# EAGLE board ccnor_stm32_v25-sync-unified-mini_panels (EAGLE 6.1), part 1 of 2
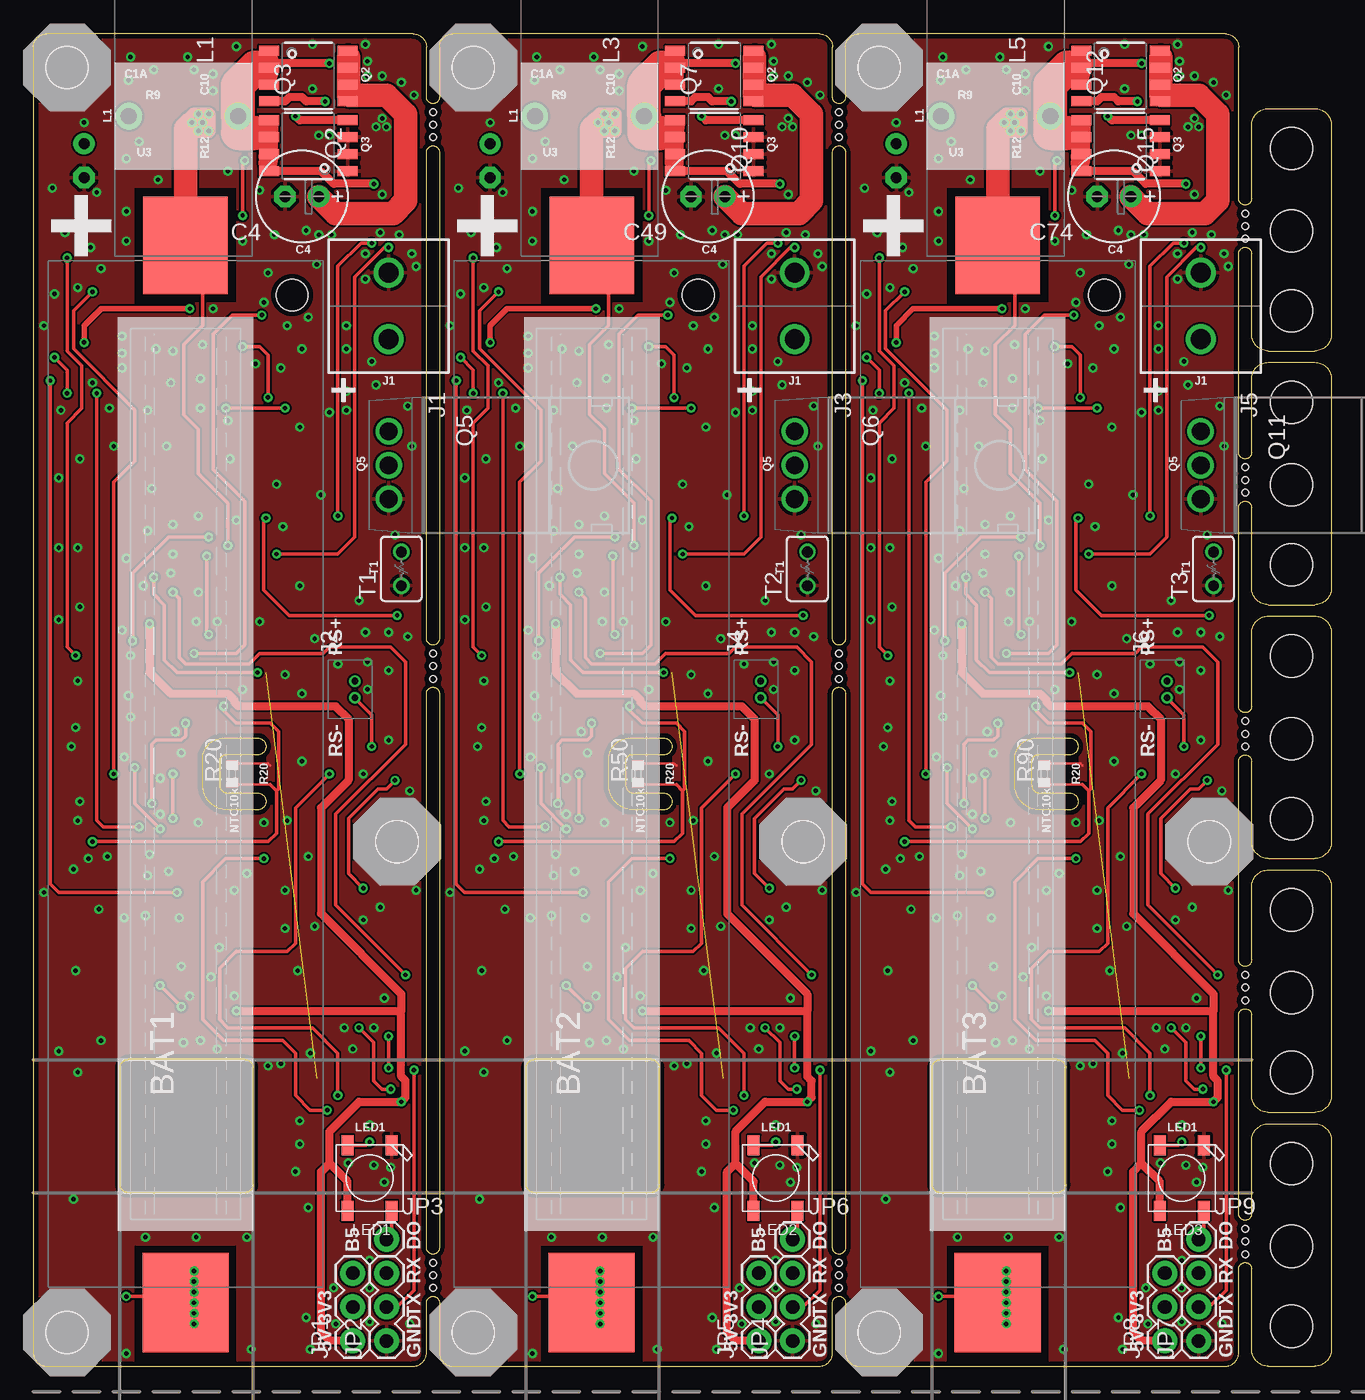
[diagram p0: board, top side]
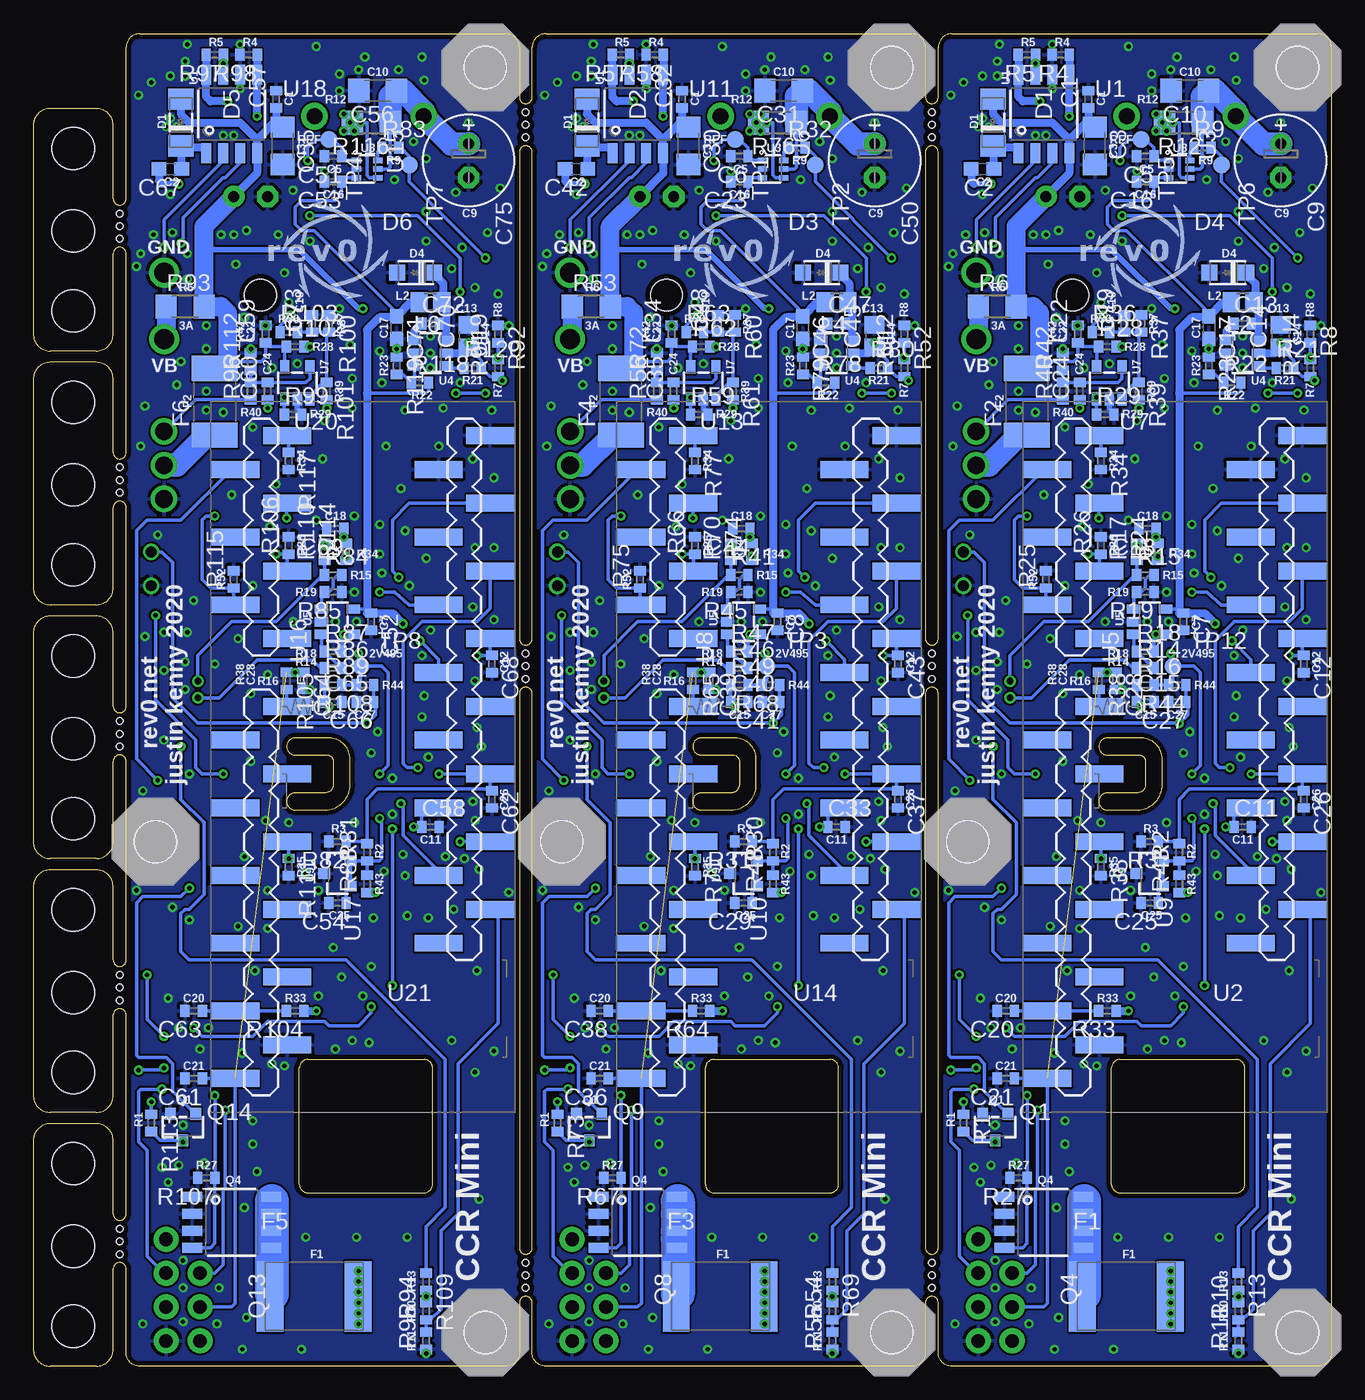
[diagram p1: board, bottom side, seen from below]

Size 97.44 x 100 mm. Coordinates in mm from the lower left corner, seen from the top.
Outline: 1,0 28.52,0 arc90 29.52,1 29.52,4.76 arc-180 30.48,4.76 30.48,1 arc90 31.48,0 58.99,0 arc90 59.99,1 59.99,4.76 arc-180 60.96,4.76 60.96,1 arc90 61.96,0 89.47,0 arc90 90.47,1 90.47,7.3 arc-180 91.44,7.3 91.44,1.27 arc90 92.71,0 96.17,0 arc90 97.44,1.27 97.44,16.93 arc90 96.17,18.2 92.71,18.2 arc90 91.44,16.93 91.44,11.43 arc-180 90.47,11.43 90.47,26.35 arc-180 91.44,26.35 91.44,20.32 arc90 92.71,19.05 96.17,19.05 arc90 97.44,20.32 97.44,35.98 arc90 96.17,37.25 92.71,37.25 arc90 91.44,35.98 91.44,30.48 arc-180 90.47,30.48 90.47,45.4 arc-180 91.44,45.4 91.44,39.37 arc90 92.71,38.1 96.17,38.1 arc90 97.44,39.37 97.44,55.03 arc90 96.17,56.3 92.71,56.3 arc90 91.44,55.03 91.44,49.53 arc-180 90.47,49.53 90.47,64.45 arc-180 91.44,64.45 91.44,58.42 arc90 92.71,57.15 96.17,57.15 arc90 97.44,58.42 97.44,74.08 arc90 96.17,75.35 92.71,75.35 arc90 91.44,74.08 91.44,68.58 arc-180 90.47,68.58 90.47,83.5 arc-180 91.44,83.5 91.44,77.47 arc90 92.71,76.2 96.17,76.2 arc90 97.44,77.47 97.44,93.13 arc90 96.17,94.4 92.71,94.4 arc90 91.44,93.13 91.44,87.63 arc-180 90.47,87.63 90.47,99 arc90 89.47,100 61.96,100 arc90 60.96,99 60.96,95.25 arc-180 59.99,95.25 59.99,99 arc90 58.99,100 31.48,100 arc90 30.48,99 30.48,95.25 arc-180 29.52,95.25 29.52,99 arc90 28.52,100 1,100 arc90 0,99 0,1 arc90 1,0
Outline: 29.52,8.89 29.52,50.48 arc-180 30.48,50.48 30.48,8.89 arc-180 29.52,8.89
Outline: 29.52,54.61 29.52,91.12 arc-180 30.48,91.12 30.48,54.61 arc-180 29.52,54.61
Outline: 16.83,45.88 14.45,45.88 arc90 13.97,45.4 13.97,43.66 arc90 14.61,43.02 16.83,43.02 arc-180 16.83,41.75 14.61,41.75 arc-90 12.7,43.66 12.7,45.56 arc-90 14.29,47.15 16.83,47.15 arc-180 16.83,45.88
Outline: 6.51,13.65 6.51,22.38 arc-90 7.14,23.02 15.88,23.02 arc-90 16.51,22.38 16.51,13.65 arc-90 15.88,13.02 7.14,13.02 arc-90 6.51,13.65
Outline: 59.99,8.89 59.99,50.48 arc-180 60.96,50.48 60.96,8.89 arc-180 59.99,8.89
Outline: 59.99,54.61 59.99,91.12 arc-180 60.96,91.12 60.96,54.61 arc-180 59.99,54.61
Outline: 47.31,45.88 44.93,45.88 arc90 44.45,45.4 44.45,43.66 arc90 45.09,43.02 47.31,43.02 arc-180 47.31,41.75 45.09,41.75 arc-90 43.18,43.66 43.18,45.56 arc-90 44.77,47.15 47.31,47.15 arc-180 47.31,45.88
Outline: 36.99,13.65 36.99,22.38 arc-90 37.62,23.02 46.35,23.02 arc-90 46.99,22.38 46.99,13.65 arc-90 46.35,13.02 37.62,13.02 arc-90 36.99,13.65
Outline: 77.79,45.88 75.41,45.88 arc90 74.93,45.4 74.93,43.66 arc90 75.56,43.02 77.79,43.02 arc-180 77.79,41.75 75.56,41.75 arc-90 73.66,43.66 73.66,45.56 arc-90 75.25,47.15 77.79,47.15 arc-180 77.79,45.88
Outline: 67.47,13.65 67.47,22.38 arc-90 68.1,23.02 76.83,23.02 arc-90 77.47,22.38 77.47,13.65 arc-90 76.83,13.02 68.1,13.02 arc-90 67.47,13.65
Copper layers (1*16): Top 0.0356mm / dielectric 1.5011mm / Bottom 0.0356mm
Design rules: minimum track width 6mil, minimum drill 13mil, track to track 6mil, track to pad 6mil, pad to pad 6mil, via to via 6mil, smd to smd 6mil, copper to edge 15mil, drill to drill 6mil, minimum pad ring 7mil, minimum via ring 7mil, stop-mask expansion 2.5mil, vias tented up to drill 14mil, thermal gap 10mil
Holes 3.17 mm at 2.54,2.54 2.54,97.47 27.3,39.37 33.02,2.54 33.02,97.47 57.78,39.37 63.5,2.54 63.5,97.47 88.27,39.37 94.44,3 94.44,9 94.44,15.2 94.44,22.05 94.44,28.05 94.44,34.25 94.44,41.1 94.44,47.1 94.44,53.3 94.44,60.15 94.44,66.15 94.44,72.35 94.44,79.2 94.44,85.2 94.44,91.4
Holes 0.5 mm at 30,92.23 30,93.19 30,94.14 30,5.87 30,6.83 30,7.78 30,51.59 30,52.55 30,53.5 60.48,92.23 60.48,93.19 60.48,94.14 60.48,5.87 60.48,6.83 60.48,7.78 90.96,8.41 90.96,9.37 90.96,10.32 90.96,27.46 90.96,28.42 90.96,29.37 90.96,46.51 90.96,47.47 90.96,48.42 90.96,65.56 90.96,66.52 90.96,67.47 90.96,84.61 90.96,85.57 90.96,86.52 60.48,51.59 60.48,52.55 60.48,53.5
tRestrict: area -0.6,94.3 to 5.7,100.6; area -0.6,-0.6 to 5.7,5.7; area 14,43 to 17.5,45.7; area 7.6,0.5 to 15.2,9; area 7.6,79.9 to 15.2,88.4; area 24.1,36.2 to 30.5,42.5; area 29.8,94.3 to 36.2,100.6; area 29.8,-0.6 to 36.2,5.7; area 44.5,43 to 47.9,45.7; area 38.1,0.5 to 45.7,9; area 38.1,79.9 to 45.7,88.4; area 54.6,36.2 to 61,42.5; area 60.3,94.3 to 66.7,100.6; area 60.3,-0.6 to 66.7,5.7; area 74.9,43 to 78.4,45.7; area 68.6,0.5 to 76.2,9; area 68.6,79.9 to 76.2,88.4; area 85.1,36.2 to 91.4,42.5
bRestrict: area 14,42.5 to 17.5,46.4; area -0.6,-0.6 to 5.7,5.7; area -0.6,94.3 to 5.7,100.6; area 24.1,36.2 to 30.5,42.5; area 44.5,42.5 to 47.9,46.4; area 29.8,-0.6 to 36.2,5.7; area 29.8,94.3 to 36.2,100.6; area 54.6,36.2 to 61,42.5; area 74.9,42.5 to 78.4,46.4; area 60.3,-0.6 to 66.7,5.7; area 60.3,94.3 to 66.7,100.6; area 85.1,36.2 to 91.4,42.5

## Footprints (pad centres in the part's own frame; a part is rotated, then mirrored left to right if it is on the bottom)
1S_18650_SMD_NH = smd 7.341 x 6.35: 1+ 39.67,0 | smd 7.46 x 6.47: 1- -39.67,0 | hole 2.39: 35.93,-8
C0402 = smd 0.7 x 0.9: 1 -0.65,0; 2 0.65,0
C0603 = smd 1.1 x 1: 1 -0.85,0; 2 0.85,0
C1206 = smd 1.6 x 1.8: 1 -1.4,0; 2 1.4,0
E2,5-7 = drill 0.813 pad 1.6: + -1.27,0 | drill 0.813 pad 1.6 octagon: - 1.27,0
C0805 = smd 1.3 x 1.5: 1 -0.85,0; 2 0.85,0
SOD123 = smd 1.6 x 1.9: A -1.75,0; K 1.75,0
SOD123W = smd 1.2 x 1.2: A -1.4,0; K 1.4,0
2920 = smd 2 x 5.3: A -3.3,0; K 3.3,0
1812 = smd 1.9 x 3.45: 1 -2.5,0; 2 2.5,0
PHOENIXCONTACT1935161 = drill 1.5: 1 0,0; 2 5,0
M02_1P25MM = drill 0.5: 1 -0.625,0; 2 0.625,0
1X03 = drill 1.016 pad 1.88: 1 0,0; 2 2.54,0; 3 5.08,0
1X01 = drill 1.016 pad 1.88: 1 0,0
INDUCTOR_10A_8.2MMX21MM = drill 1.2 pad 2: P$1 0,4.1; P$2 0,-4.1
0805 = smd 1.3 x 1.5: 1 -0.85,0; 2 0.85,0
WS2812B = smd 1.5 x 0.9: 1-VDD 2.45,-1.65; 2-DOUT 2.45,1.65; 3-GND -2.45,1.65; 4-DIN -2.45,-1.65
SOT23 = smd 0.8 x 0.9: 1 0.95,1; 2 -0.95,1; 3 0,-1
8-SOIC = smd 0.75 x 1.5: 1 -1.905,-2.95; 2 -0.635,-2.95; 3 0.635,-2.95; 4 1.905,-2.95; 5 1.905,2.95; 6 0.635,2.95; 7 -0.635,2.95; 8 -1.905,2.95
TO-220 = drill 1.325: 1 -2.54,0; 2 0,0; 3 2.54,0
R0402 = smd 0.7 x 0.9: 1 -0.65,0; 2 0.65,0
R1206 = smd 1.6 x 1.803: 1 -1.422,0; 2 1.422,0
THERMISTOR_3MMX3MM = drill 0.813: 1 -1.27,0; 2 1.27,0
TPAD_MED_ROUND = smd 1.27 x 1.27: 1 0,0
STM32_BLUE_PILL_SMD = smd 3.607 x 1.27: 3V3 -9.563,-19.05; 3V3_2 9.563,24.13; 5V 9.563,19.05; A0 -5.677,13.97; A1 -9.563,11.43; A2 -5.677,8.89; A3 -9.563,6.35; A4 -5.677,3.81; A5 -9.563,1.27; A6 -5.677,-1.27; A7 -9.563,-3.81; A8 5.677,-13.97; A9 9.563,-11.43; A10 5.677,-8.89; A12 5.677,-3.81; A15 9.563,-1.27; B0 -5.677,-6.35; B1 -9.563,-8.89; B3 5.677,1.27; B4 9.563,3.81; B5 5.677,6.35; B6 9.563,8.89; B7 5.677,11.43; B8 9.563,13.97; B9 5.677,16.51; B10 -5.677,-11.43; B11 -9.563,-13.97; B12 5.677,-24.13; B13 9.563,-21.59; B14 5.677,-19.05; B15 9.563,-16.51; GND -9.563,-24.13; GND2 -5.677,-21.59; GND4 5.677,21.59; RST -5.677,-16.51
SOT-363 = smd 0.42 x 0.7: 1 -0.65,-0.8; 2 0,-0.8; 3 0.65,-0.8; 4 0.65,0.8; 5 0,0.8; 6 -0.65,0.8
SOT23-6 = smd 0.7 x 1: 1 -0.95,-1.2; 2 0,-1.2; 3 0.95,-1.2; 4 0.95,1.2; 5 0,1.2; 6 -0.95,1.2
SOT23-5 = smd 0.7 x 1: 1 0.95,1.2; 2 0,1.2; 3 -0.95,1.2; 4 -0.95,-1.2; 5 0.95,-1.2

## Placement (x,y rotation side)
BAT1  1_18650_HOLDER  [1S_18650_SMD_NH]  11.43,44.45 90 top
BAT2  1_18650_HOLDER  [1S_18650_SMD_NH]  41.91,44.45 90 top
BAT3  1_18650_HOLDER  [1S_18650_SMD_NH]  72.39,44.45 90 top
C1  1u  [C0402]  18.26,95.09 90 bottom
C2  1u  [C0603]  26.19,89.85 180 bottom
C3  10u  [C1206]  17.78,91.6 270 bottom
C4  470u  [E2,5-7]  20.16,87.79 180 top
C5  1u  [C0402]  13.97,90.81 180 bottom
C6  1u  [C0402]  44.45,90.81 180 bottom
C7  1u  [C0402]  11.11,55.88 270 bottom
C8  1u  [C0402]  41.59,55.88 270 bottom
C9  470u  [E2,5-7]  3.81,90.49 270 bottom
C10  10u  [C1206]  10.64,95.73 180 bottom
C11  1u  [C0402]  6.67,40.48 0 bottom
C12  100n  [C0402]  2.06,52.7 270 bottom
C13  100n  [C0402]  6.67,78.26 0 bottom
C14  22u  [C0805]  3.81,77.31 90 bottom
C15  1u  [C0402]  13.97,49.85 0 bottom
C16  1u  [C0402]  13.97,88.9 180 bottom
C17  22u  [C0603]  9.21,77.95 270 bottom
C18  100n  [C0402]  13.81,62.87 180 bottom
C19  100n  [C0402]  15.56,78.26 90 bottom
C20  1u  [C0402]  24.45,26.67 180 bottom
C21  1u  [C0402]  24.45,21.59 180 bottom
C22  1u  [C0402]  19.05,77.47 90 bottom
C23  1u  [C0402]  44.45,88.9 180 bottom
C24  DNI  [C0402]  18.89,73.18 90 bottom
C25  1u  [C0402]  13.65,34.77 180 bottom
C26  4.7u  [C0402]  2.06,42.55 270 bottom
C27  1u  [C0402]  11.59,49.85 180 bottom
C28  1u  [C0402]  16.19,51.44 270 bottom
C29  1u  [C0402]  44.13,34.77 180 bottom
C30  10u  [C1206]  48.26,91.6 270 bottom
C31  10u  [C1206]  41.12,95.73 180 bottom
C32  1u  [C0402]  48.74,95.09 90 bottom
C33  1u  [C0402]  37.15,40.48 0 bottom
C34  1u  [C0402]  49.53,77.47 90 bottom
C35  DNI  [C0402]  49.37,73.18 90 bottom
C36  1u  [C0402]  54.93,21.59 180 bottom
C37  4.7u  [C0402]  32.54,42.55 270 bottom
C38  1u  [C0402]  54.93,26.67 180 bottom
C39  1u  [C0402]  46.67,51.44 270 bottom
C40  1u  [C0402]  44.45,49.85 0 bottom
C41  1u  [C0402]  42.07,49.85 180 bottom
C42  1u  [C0603]  56.67,89.85 180 bottom
C43  100n  [C0402]  32.54,52.7 270 bottom
C44  100n  [C0402]  44.29,62.87 180 bottom
C45  22u  [C0805]  34.29,77.31 90 bottom
C46  22u  [C0603]  39.69,77.95 270 bottom
C47  100n  [C0402]  37.15,78.26 0 bottom
C48  100n  [C0402]  46.04,78.26 90 bottom
C49  470u  [E2,5-7]  50.64,87.79 180 top
C50  470u  [E2,5-7]  34.29,90.49 270 bottom
C51  1u  [C0402]  74.93,90.81 180 bottom
C52  1u  [C0402]  72.07,55.88 270 bottom
C53  1u  [C0402]  74.93,88.9 180 bottom
C54  1u  [C0402]  74.61,34.77 180 bottom
C55  10u  [C1206]  78.74,91.6 270 bottom
C56  10u  [C1206]  71.6,95.73 180 bottom
C57  1u  [C0402]  79.22,95.09 90 bottom
C58  1u  [C0402]  67.63,40.48 0 bottom
C59  1u  [C0402]  80.01,77.47 90 bottom
C60  DNI  [C0402]  79.85,73.18 90 bottom
C61  1u  [C0402]  85.41,21.59 180 bottom
C62  4.7u  [C0402]  63.02,42.55 270 bottom
C63  1u  [C0402]  85.41,26.67 180 bottom
C64  1u  [C0402]  77.15,51.44 270 bottom
C65  1u  [C0402]  74.93,49.85 0 bottom
C66  1u  [C0402]  72.55,49.85 180 bottom
C67  1u  [C0603]  87.15,89.85 180 bottom
C68  100n  [C0402]  63.02,52.7 270 bottom
C69  100n  [C0402]  74.77,62.87 180 bottom
C70  22u  [C0805]  64.77,77.31 90 bottom
C71  22u  [C0603]  70.17,77.95 270 bottom
C72  100n  [C0402]  67.63,78.26 0 bottom
C73  100n  [C0402]  76.52,78.26 90 bottom
C74  470u  [E2,5-7]  81.12,87.79 180 top
C75  470u  [E2,5-7]  64.77,90.49 270 bottom
D1  SS16F  [SOD123]  25.4,93.34 270 bottom
D2  SS16F  [SOD123]  55.88,93.34 270 bottom
D3  B5819W  [SOD123W]  38.26,82.07 0 bottom
D4  B5819W  [SOD123W]  7.78,82.07 0 bottom
D5  SS16F  [SOD123]  86.36,93.34 270 bottom
D6  B5819W  [SOD123W]  68.74,82.07 0 bottom
F1  PTC2920  [2920]  15.4,5.24 0 bottom
F2  PTC1812  [1812]  22.86,72.39 90 bottom
F3  PTC2920  [2920]  45.88,5.24 0 bottom
F4  PTC1812  [1812]  53.34,72.39 90 bottom
F5  PTC2920  [2920]  76.36,5.24 0 bottom
F6  PTC1812  [1812]  83.82,72.39 90 bottom
J1  M02PT  [PHOENIXCONTACT1935161]  26.67,82.07 270 top
J2  M021P25  [M02_1P25MM]  24.13,50.8 90 top
J3  M02PT  [PHOENIXCONTACT1935161]  57.15,82.07 270 top
J4  M021P25  [M02_1P25MM]  54.61,50.8 90 top
J5  M02PT  [PHOENIXCONTACT1935161]  87.63,82.07 270 top
J6  M021P25  [M02_1P25MM]  85.09,50.8 90 top
JP1  [1X03]  23.97,1.91 90 top
JP2  [1X03]  26.51,1.91 90 top
JP3  M01PTH  [1X01]  26.51,9.53 0 top
JP4  [1X03]  56.99,1.91 90 top
JP5  [1X03]  54.45,1.91 90 top
JP6  M01PTH  [1X01]  56.99,9.53 0 top
JP7  [1X03]  87.47,1.91 90 top
JP8  [1X03]  84.93,1.91 90 top
JP9  M01PTH  [1X01]  87.47,9.53 0 top
L1  60u  [INDUCTOR_10A_8.2MMX21MM]  11.27,93.82 270 top
L2  4.7u  [0805]  6.67,79.85 180 bottom
L3  60u  [INDUCTOR_10A_8.2MMX21MM]  41.75,93.82 270 top
L4  4.7u  [0805]  37.15,79.85 180 bottom
L5  60u  [INDUCTOR_10A_8.2MMX21MM]  72.23,93.82 270 top
L6  4.7u  [0805]  67.63,79.85 180 bottom
LED1  WS2812B  [WS2812B]  25.24,14.13 270 top
LED2  WS2812B  [WS2812B]  55.72,14.13 270 top
LED3  WS2812B  [WS2812B]  86.2,14.13 270 top
Q1  2N7002P  [SOT23]  25.24,17.94 0 bottom
Q2  WSP4406  [8-SOIC]  20.64,96.84 270 top
Q3  WSP4406  [8-SOIC]  20.64,91.6 90 top
Q4  NCE3018AS  [8-SOIC]  21.59,10.79 270 bottom
Q5  IRLB8314PBF  [TO-220]  26.67,67.63 270 top
Q6  IRLB8314PBF  [TO-220]  57.15,67.63 270 top
Q7  WSP4406  [8-SOIC]  51.12,91.6 90 top
Q8  NCE3018AS  [8-SOIC]  52.07,10.79 270 bottom
Q9  2N7002P  [SOT23]  55.72,17.94 0 bottom
Q10  WSP4406  [8-SOIC]  51.12,96.84 270 top
Q11  IRLB8314PBF  [TO-220]  87.63,67.63 270 top
Q12  WSP4406  [8-SOIC]  81.6,91.6 90 top
Q13  NCE3018AS  [8-SOIC]  82.55,10.79 270 bottom
Q14  2N7002P  [SOT23]  86.2,17.94 0 bottom
Q15  WSP4406  [8-SOIC]  81.6,96.84 270 top
R1  680  [R0402]  27.62,18.26 270 bottom
R2  820  [R0402]  11.43,38.58 90 bottom
R3  1.6k  [R0402]  13.65,39.37 180 bottom
R4  10k  [R0402]  20.32,98.42 180 bottom
R5  10k  [R0402]  22.86,98.42 180 bottom
R6  5A  [R1206]  25.08,79.53 0 bottom
R7  30k  [R0402]  1.59,74.93 90 bottom
R8  10k  [R0402]  1.59,77.47 270 bottom
R9  1.6k  [R0402]  9.68,91.44 0 bottom
R10  10k  [R0402]  6.99,4.13 90 bottom
R11  10k  [R0402]  6.99,1.91 90 bottom
R12  5m  [R1206]  11.11,93.34 180 bottom
R13  100  [R0402]  6.99,6.35 270 bottom
R14  220k  [R0402]  13.97,52.39 0 bottom
R15  220k  [R0402]  13.97,59.37 0 bottom
R16  10k  [R0402]  13.97,51.12 0 bottom
R17  100  [R0402]  14.61,61.12 90 bottom
R18  150k  [R0402]  13.97,53.66 0 bottom
R19  150k  [R0402]  13.97,58.1 180 bottom
R20  NTC 10k  [R0402]  14.92,44.45 90 top
R21  150k  [R0402]  3.49,74.93 0 bottom
R22  51k  [R0402]  7.46,73.82 0 bottom
R23  10k  [R0402]  9.21,75.09 270 bottom
R24  1.6k  [R0402]  13.02,61.12 90 bottom
R25  10k  [R0402]  21.43,59.05 90 bottom
R26  10k  [R0402]  17.3,61.59 90 bottom
R27  10k  [R0402]  23.5,14.13 180 bottom
R28  68k  [R0402]  16.83,76.52 0 bottom
R29  13k  [R0402]  16.99,71.44 0 bottom
R30  820  [R0402]  41.91,38.58 90 bottom
R31  1.6k  [R0402]  44.13,39.37 180 bottom
R32  1.6k  [R0402]  40.16,91.44 0 bottom
R33  10  [R0402]  16.83,26.67 180 bottom
R34  10k  [R0402]  17.3,67.94 270 bottom
R35  10k  [R0402]  17.3,37.47 270 bottom
R36  2.4k  [R0402]  17.3,77.63 0 bottom
R37  10k  [R0402]  14.29,78.26 270 bottom
R38  1.6k  [R0402]  17.46,51.44 270 bottom
R39  DNI  [R0402]  14.45,73.18 270 bottom
R40  680  [R0402]  20.16,73.18 90 bottom
R41  220k  [R0402]  44.45,59.37 0 bottom
R42  DNI  [R0402]  20.16,75.41 90 bottom
R43  510  [R0402]  11.43,36.2 90 bottom
R44  10k  [R0402]  11.59,51.12 180 bottom
R45  150k  [R0402]  44.45,58.1 180 bottom
R46  220k  [R0402]  44.45,52.39 0 bottom
R47  150k  [R0402]  44.45,53.66 0 bottom
R48  510  [R0402]  41.91,36.2 90 bottom
R49  10k  [R0402]  44.45,51.12 0 bottom
R50  NTC 10k  [R0402]  45.4,44.45 90 top
R51  30k  [R0402]  32.07,74.93 90 bottom
R52  10k  [R0402]  32.07,77.47 270 bottom
R53  5A  [R1206]  55.56,79.53 0 bottom
R54  10k  [R0402]  37.47,4.13 90 bottom
R55  10k  [R0402]  37.47,1.91 90 bottom
R56  680  [R0402]  50.64,73.18 90 bottom
R57  10k  [R0402]  53.34,98.42 180 bottom
R58  10k  [R0402]  50.8,98.42 180 bottom
R59  13k  [R0402]  47.47,71.44 0 bottom
R60  10k  [R0402]  44.77,78.26 270 bottom
R61  DNI  [R0402]  44.93,73.18 270 bottom
R62  68k  [R0402]  47.31,76.52 0 bottom
R63  2.4k  [R0402]  47.78,77.63 0 bottom
R64  10  [R0402]  47.31,26.67 180 bottom
R65  1.6k  [R0402]  47.94,51.44 270 bottom
R66  10k  [R0402]  47.78,61.59 90 bottom
R67  10k  [R0402]  53.98,14.13 180 bottom
R68  10k  [R0402]  42.07,51.12 180 bottom
R69  100  [R0402]  37.47,6.35 270 bottom
R70  100  [R0402]  45.09,61.12 90 bottom
R71  10k  [R0402]  47.78,37.47 270 bottom
R72  DNI  [R0402]  50.64,75.41 90 bottom
R73  680  [R0402]  58.1,18.26 270 bottom
R74  1.6k  [R0402]  43.5,61.12 90 bottom
R75  10k  [R0402]  51.91,59.05 90 bottom
R76  5m  [R1206]  41.59,93.34 180 bottom
R77  10k  [R0402]  47.78,67.94 270 bottom
R78  51k  [R0402]  37.94,73.82 0 bottom
R79  10k  [R0402]  39.69,75.09 270 bottom
R80  150k  [R0402]  33.97,74.93 0 bottom
R81  820  [R0402]  72.39,38.58 90 bottom
R82  1.6k  [R0402]  74.61,39.37 180 bottom
R83  1.6k  [R0402]  70.64,91.44 0 bottom
R84  220k  [R0402]  74.93,59.37 0 bottom
R85  150k  [R0402]  74.93,58.1 180 bottom
R86  220k  [R0402]  74.93,52.39 0 bottom
R87  150k  [R0402]  74.93,53.66 0 bottom
R88  510  [R0402]  72.39,36.2 90 bottom
R89  10k  [R0402]  74.93,51.12 0 bottom
R90  NTC 10k  [R0402]  75.88,44.45 90 top
R91  30k  [R0402]  62.55,74.93 90 bottom
R92  10k  [R0402]  62.55,77.47 270 bottom
R93  5A  [R1206]  86.04,79.53 0 bottom
R94  10k  [R0402]  67.94,4.13 90 bottom
R95  10k  [R0402]  67.94,1.91 90 bottom
R96  680  [R0402]  81.12,73.18 90 bottom
R97  10k  [R0402]  83.82,98.42 180 bottom
R98  10k  [R0402]  81.28,98.42 180 bottom
R99  13k  [R0402]  77.95,71.44 0 bottom
R100  10k  [R0402]  75.25,78.26 270 bottom
R101  DNI  [R0402]  75.41,73.18 270 bottom
R102  68k  [R0402]  77.79,76.52 0 bottom
R103  2.4k  [R0402]  78.26,77.63 0 bottom
R104  10  [R0402]  77.79,26.67 180 bottom
R105  1.6k  [R0402]  78.42,51.44 270 bottom
R106  10k  [R0402]  78.26,61.59 90 bottom
R107  10k  [R0402]  84.45,14.13 180 bottom
R108  10k  [R0402]  72.55,51.12 180 bottom
R109  100  [R0402]  67.94,6.35 270 bottom
R110  100  [R0402]  75.56,61.12 90 bottom
R111  10k  [R0402]  78.26,37.47 270 bottom
R112  DNI  [R0402]  81.12,75.41 90 bottom
R113  680  [R0402]  88.58,18.26 270 bottom
R114  1.6k  [R0402]  73.98,61.12 90 bottom
R115  10k  [R0402]  82.39,59.05 90 bottom
R116  5m  [R1206]  72.07,93.34 180 bottom
R117  10k  [R0402]  78.26,67.94 270 bottom
R118  51k  [R0402]  68.42,73.82 0 bottom
R119  10k  [R0402]  70.17,75.09 270 bottom
R120  150k  [R0402]  64.45,74.93 0 bottom
T1  NTC3MM  [THERMISTOR_3MMX3MM]  27.62,59.85 90 top
T2  NTC3MM  [THERMISTOR_3MMX3MM]  58.1,59.85 90 top
T3  NTC3MM  [THERMISTOR_3MMX3MM]  88.58,59.85 90 top
TP1  TPADMED_ROUND  [TPAD_MED_ROUND]  44.77,92.08 270 bottom
TP2  TPADMED_ROUND  [TPAD_MED_ROUND]  38.73,90.17 270 bottom
TP3  TPADMED_ROUND  [TPAD_MED_ROUND]  42.39,52.55 0 bottom
TP4  TPADMED_ROUND  [TPAD_MED_ROUND]  75.25,92.08 270 bottom
TP5  TPADMED_ROUND  [TPAD_MED_ROUND]  14.29,92.08 270 bottom
TP6  TPADMED_ROUND  [TPAD_MED_ROUND]  8.26,90.17 270 bottom
TP7  TPADMED_ROUND  [TPAD_MED_ROUND]  69.22,90.17 270 bottom
TP8  TPADMED_ROUND  [TPAD_MED_ROUND]  72.87,52.55 0 bottom
TP12  TPADMED_ROUND  [TPAD_MED_ROUND]  11.91,52.55 0 bottom
U1  ADP3110A  [8-SOIC]  21.59,93.98 0 bottom
U2  STM32_BLUE_PILL_LESS  [STM32_BLUE_PILL_SMD]  11.75,45.72 180 bottom
U3  NCS199A1  [SOT-363]  11.43,89.85 270 bottom
U4  MP2359  [SOT23-6]  6.67,76.04 270 bottom
U5  MCP6001U  [SOT23-5]  13.65,55.88 90 bottom
U6  NCS199A1  [SOT-363]  41.91,89.85 270 bottom
U7  LM321  [SOT23-5]  16.67,73.82 180 bottom
U8  MCP6001U  [SOT23-5]  44.13,55.88 90 bottom
U9  TL431SOT23  [SOT23]  13.65,36.99 270 bottom
U10  TL431SOT23  [SOT23]  44.13,36.99 270 bottom
U11  ADP3110A  [8-SOIC]  52.07,93.98 0 bottom
U12  MP2359  [SOT23-6]  37.15,76.04 270 bottom
U13  LM321  [SOT23-5]  47.15,73.82 180 bottom
U14  STM32_BLUE_PILL_LESS  [STM32_BLUE_PILL_SMD]  42.23,45.72 180 bottom
U15  NCS199A1  [SOT-363]  72.39,89.85 270 bottom
U16  MCP6001U  [SOT23-5]  74.61,55.88 90 bottom
U17  TL431SOT23  [SOT23]  74.61,36.99 270 bottom
U18  ADP3110A  [8-SOIC]  82.55,93.98 0 bottom
U19  MP2359  [SOT23-6]  67.63,76.04 270 bottom
U20  LM321  [SOT23-5]  77.63,73.82 180 bottom
U21  STM32_BLUE_PILL_LESS  [STM32_BLUE_PILL_SMD]  72.71,45.72 180 bottom

## Library data of the parts
BAT1-BAT3 D1-D6 F1-F6 J1-J6 L1-L6 Q1-Q15 T1-T3 TP1-TP8 TP12 U1-U21 = custom
C1-C75 R1-R120 = resistor
JP1-JP9 = SparkFun
LED1-LED3 = adafruit

## Nets
2V1: C29.1 R30.1 R48.2 R49.2 R63.1 R68.2 TP3.1 U10.1 U10.2
2V2: C54.1 R81.1 R88.2 R89.2 R103.1 R108.2 TP8.1 U17.1 U17.2
2V495: C25.1 R2.1 R16.2 R36.1 R43.2 R44.2 TP12.1 U9.1 U9.2
3V1: C36.1 C39.1 JP5.2 R65.1 U14.3V3 U14.3V3_2
3V2: C61.1 C64.1 JP8.2 R105.1 U21.3V3 U21.3V3_2
3V3: C21.1 C28.1 JP1.2 R38.1 U2.3V3 U2.3V3_2
5V: C7.1 C16.1 C17.1 JP1.1 L2.2 LED1.1-VDD R1.1 R22.2 R33.1 U3.3 U5.5
5V1: C8.1 C23.1 C46.1 JP5.1 L4.2 LED2.1-VDD R64.1 R73.1 R78.2 U6.3 U8.5
5V2: C52.1 C53.1 C71.1 JP8.1 L6.2 LED3.1-VDD R104.1 R113.1 R118.2 U15.3 U16.5
5V_USB: C20.1 R33.2 U2.5V
5V_USB1: C38.1 R64.2 U14.5V
5V_USB2: C63.1 R104.2 U21.5V
7V1: C30.1 C32.1 C34.1 C45.1 C49.+ D2.A F4.2 Q10.5 Q10.6 Q10.7 Q10.8 R48.1 R51.1 R53.2 R62.1 R80.2 U11.4 U12.5 U13.5
7V2: C55.1 C57.1 C59.1 C70.1 C74.+ D5.A F6.2 Q15.5 Q15.6 Q15.7 Q15.8 R88.1 R91.1 R93.2 R102.1 R120.2 U18.4 U19.5 U20.5
7V4: C1.1 C3.1 C4.+ C14.1 C22.1 D1.A F2.2 Q2.5 Q2.6 Q2.7 Q2.8 R6.2 R7.1 R21.2 R28.1 R43.1 U1.4 U4.5 U7.5
7V4_SNS: C11.1 R7.2 R8.2 U2.A4
7V4_SNS1: C33.1 R51.2 R52.2 U14.A4
7V4_SNS2: C58.1 R91.2 R92.2 U21.A4
BST: C2.1 D1.K U1.1
BST1: C42.1 D2.K U11.1
BST2: C67.1 D5.K U18.1
BST5V: C13.1 U4.1
BST5V1: C47.1 U12.1
BST5V2: C72.1 U19.1
C1+: BAT1.1+ R12.2 R17.2 U3.4
C1+1: BAT2.1+ R70.2 R76.2 U6.4
C1+2: BAT3.1+ R110.2 R116.2 U15.4
C1-: BAT1.1- F1.K R10.2 R13.2
C1-1: BAT2.1- F3.K R54.2 R69.2
C1-2: BAT3.1- F5.K R94.2 R109.2
C1A: C12.1 R9.2 TP6.1 U2.B1
C1A1: C43.1 R32.2 TP2.1 U14.B1
C1A2: C68.1 R83.2 TP7.1 U21.B1
C1COFF: R25.1 U1.3 U2.A9
C1COFF1: R75.1 U11.3 U14.A9
C1COFF2: R115.1 U18.3 U21.A9
C1FET: R26.1 U1.2 U2.A8
C1FET1: R66.1 U11.2 U14.A8
C1FET2: R106.1 U18.2 U21.A8
C1N: C2.2 L1.P$1 Q2.1 Q2.2 Q2.3 Q3.5 Q3.6 Q3.7 Q3.8 R5.1 U1.7
C1N1: C42.2 L3.P$1 Q7.5 Q7.6 Q7.7 Q7.8 Q10.1 Q10.2 Q10.3 R57.1 U11.7
C1N2: C67.2 L5.P$1 Q12.5 Q12.6 Q12.7 Q12.8 Q15.1 Q15.2 Q15.3 R97.1 U18.7
C1ON: Q4.4 R27.1 U2.B14
C1ON1: Q8.4 R67.1 U14.B14
C1ON2: Q13.4 R107.1 U21.B14
C1R: R10.1 R11.2 U2.A1
C1R1: R54.1 R55.2 U14.A1
C1R2: R94.1 R95.2 U21.A1
C1TH: C15.1 R16.1 R20.1 U2.A3
C1TH1: C40.1 R49.1 R50.1 U14.A3
C1TH2: C65.1 R89.1 R90.1 U21.A3
C1V: C18.1 R24.2 U2.B0
C1V1: C44.1 R74.2 U14.B0
C1V2: C69.1 R114.2 U21.B0
C1V_OA: R18.2 R24.1 U5.4
C1V_OA1: R47.2 R74.1 U8.4
C1V_OA2: R87.2 R114.1 U16.4
C1VFBN: C24.1 R39.2
C1VFBN1: C35.1 R61.2
C1VFBN2: C60.1 R101.2
CVNGATE: C24.2 R40.2 R42.1 U7.4
CVNGATE1: C35.2 R56.2 R72.1 U13.4
CVNGATE2: C60.2 R96.2 R112.1 U20.4
CVOAREF: C19.1 R36.2 R37.2 R39.1 U7.3
CVOAREF1: C48.1 R60.2 R61.1 R63.2 U13.3
CVOAREF2: C73.1 R100.2 R101.1 R103.2 U20.3
CVOASNS: R28.2 R29.1 U7.1
CVOASNS1: R59.1 R62.2 U13.1
CVOASNS2: R99.1 R102.2 U20.1
DI: Q1.1 U2.B13
DI1: LED1.4-DIN Q1.3 R1.2
DI2: JP3.1 LED1.2-DOUT
DI3: LED2.4-DIN Q9.3 R73.2
DI4: Q9.1 U14.B13
DI5: JP6.1 LED2.2-DOUT
DI6: LED3.4-DIN Q14.3 R113.2
DI7: Q14.1 U21.B13
DI8: JP9.1 LED3.2-DOUT
EN5V: R21.1 U4.4
EN5V1: R80.1 U12.4
EN5V2: R120.1 U19.4
FANON: U2.B4
FANON1: U14.B4
FANON2: U21.B4
FB5V: R22.1 R23.2 U4.3
FB5V1: R78.1 R79.2 U12.3
FB5V2: R118.1 R119.2 U19.3
GND: C1.2 C3.2 C4.- C5.2 C7.2 C9.- C10.2 C11.2 C12.2 C14.2 C15.2 C16.2 C17.2 C18.2 C19.2 C20.2 C21.2 C22.2 C25.2 C26.2 C27.2 C28.2 D4.A J1.1 JP2.1 LED1.3-GND Q1.2 Q3.1 Q3.2 Q3.3 Q4.1 Q4.2 Q4.3 Q5.3 R3.2 R4.2 R8.1 R11.1 R19.1 R20.2 R23.1 R25.2 R26.2 R27.2 R29.2 R34.2 R35.2 R37.1 R42.2 T1.1 U1.6 U2.GND U2.GND2 U2.GND4 U3.2 U4.2 U5.2 U7.2 U9.3
GND1: C6.2 C8.2 C23.2 C29.2 C30.2 C31.2 C32.2 C33.2 C34.2 C36.2 C37.2 C38.2 C39.2 C40.2 C41.2 C43.2 C44.2 C45.2 C46.2 C48.2 C49.- C50.- D3.A J3.1 JP4.1 LED2.3-GND Q6.3 Q7.1 Q7.2 Q7.3 Q8.1 Q8.2 Q8.3 Q9.2 R31.2 R45.1 R50.2 R52.1 R55.1 R58.2 R59.2 R60.1 R66.2 R67.2 R71.2 R72.2 R75.2 R77.2 R79.1 T2.1 U6.2 U8.2 U10.3 U11.6 U12.2 U13.2 U14.GND U14.GND2 U14.GND4
GND2: C51.2 C52.2 C53.2 C54.2 C55.2 C56.2 C57.2 C58.2 C59.2 C61.2 C62.2 C63.2 C64.2 C65.2 C66.2 C68.2 C69.2 C70.2 C71.2 C73.2 C74.- C75.- D6.A J5.1 JP7.1 LED3.3-GND Q11.3 Q12.1 Q12.2 Q12.3 Q13.1 Q13.2 Q13.3 Q14.2 R82.2 R85.1 R90.2 R92.1 R95.1 R98.2 R99.2 R100.1 R106.2 R107.2 R111.2 R112.2 R115.2 R117.2 R119.1 T3.1 U15.2 U16.2 U17.3 U18.6 U19.2 U20.2 U21.GND U21.GND2 U21.GND4
HSTH: C27.1 R44.1 T1.2 U2.A2
HSTH1: C41.1 R68.1 T2.2 U14.A2
HSTH2: C66.1 R108.1 T3.2 U21.A2
IN-1: C9.+ C10.1 L1.P$2 R12.1 U3.5
IN-2: C31.1 C50.+ L3.P$2 R76.1 U6.5
IN-3: C56.1 C75.+ L5.P$2 R116.1 U15.5
IS1O: R9.1 U3.6
IS1O1: R32.1 U6.6
IS1O2: R83.1 U15.6
ISNS_REF: C5.1 C26.1 R2.2 R3.1 TP5.1 U2.A5 U3.1
ISNS_REF1: C6.1 C37.1 R30.2 R31.1 TP1.1 U6.1 U14.A5
ISNS_REF2: C51.1 C62.1 R81.2 R82.1 TP4.1 U15.1 U21.A5
N$1: R41.2 R45.2 U8.1
N$2: R46.2 R47.1 U8.3
N$3: R15.2 R19.2 U5.1
N$4: R14.2 R18.1 U5.3
N$5: J3.2 R53.1
N$6: R65.2 U14.A12
N$7: F3.A Q8.5 Q8.6 Q8.7 Q8.8
N$8: F4.1 Q6.2
N$9: R84.2 R85.2 U16.1
N$10: F2.1 Q5.2
N$11: R86.2 R87.1 U16.3
N$12: J5.2 R93.1
N$13: J1.2 R6.1
N$14: R105.2 U21.A12
N$15: F5.A Q13.5 Q13.6 Q13.7 Q13.8
N$16: F6.1 Q11.2
N$26: R38.2 U2.A12
N$32: F1.A Q4.5 Q4.6 Q4.7 Q4.8
NGATE1: Q3.4 R4.1 U1.5
NGATE2: Q7.4 R58.1 U11.5
NGATE3: Q12.4 R98.1 U18.5
OA1+: J2.2 R15.1 R17.1
OA1+1: J4.2 R41.1 R70.1
OA1+2: J6.2 R84.1 R110.1
OA1-: J2.1 R13.1 R14.1
OA1-1: J4.1 R46.1 R69.1
OA1-2: J6.1 R86.1 R109.1
PB1: JP5.3 R71.1 U14.B5
PB2: R77.1 U14.B12
PB3: JP8.3 R111.1 U21.B5
PB4: R117.1 U21.B12
PB5: JP1.3 R35.1 U2.B5
PB12: R34.1 U2.B12
PGATE1: Q2.4 R5.2 U1.8
PGATE2: Q10.4 R57.2 U11.8
PGATE3: Q15.4 R97.2 U18.8
Q7G: Q5.1 R40.1
Q7G1: Q6.1 R56.1
Q7G2: Q11.1 R96.1
SCL-TX: JP2.2 U2.B10
SCL-TX1: JP4.2 U14.B10
SCL-TX2: JP7.2 U21.B10
SDA-RX: JP2.3 U2.B11
SDA-RX1: JP4.3 U14.B11
SDA-RX2: JP7.3 U21.B11
SW5V: C13.2 D4.K L2.1 U4.6
SW5V1: C47.2 D3.K L4.1 U12.6
SW5V2: C72.2 D6.K L6.1 U19.6